# Altium PCB STM32_F407.PcbDoc
Units mil, origin at the board's own origin, x right, y up, seen from the top; angles counter-clockwise.
Board outline 5420 x 5865 mil, 2 copper layers (TopLayer, BottomLayer); 25 components, 137 nets, 447 pads, 0 vias.
Unrouted connection lines stored in the file: 288.
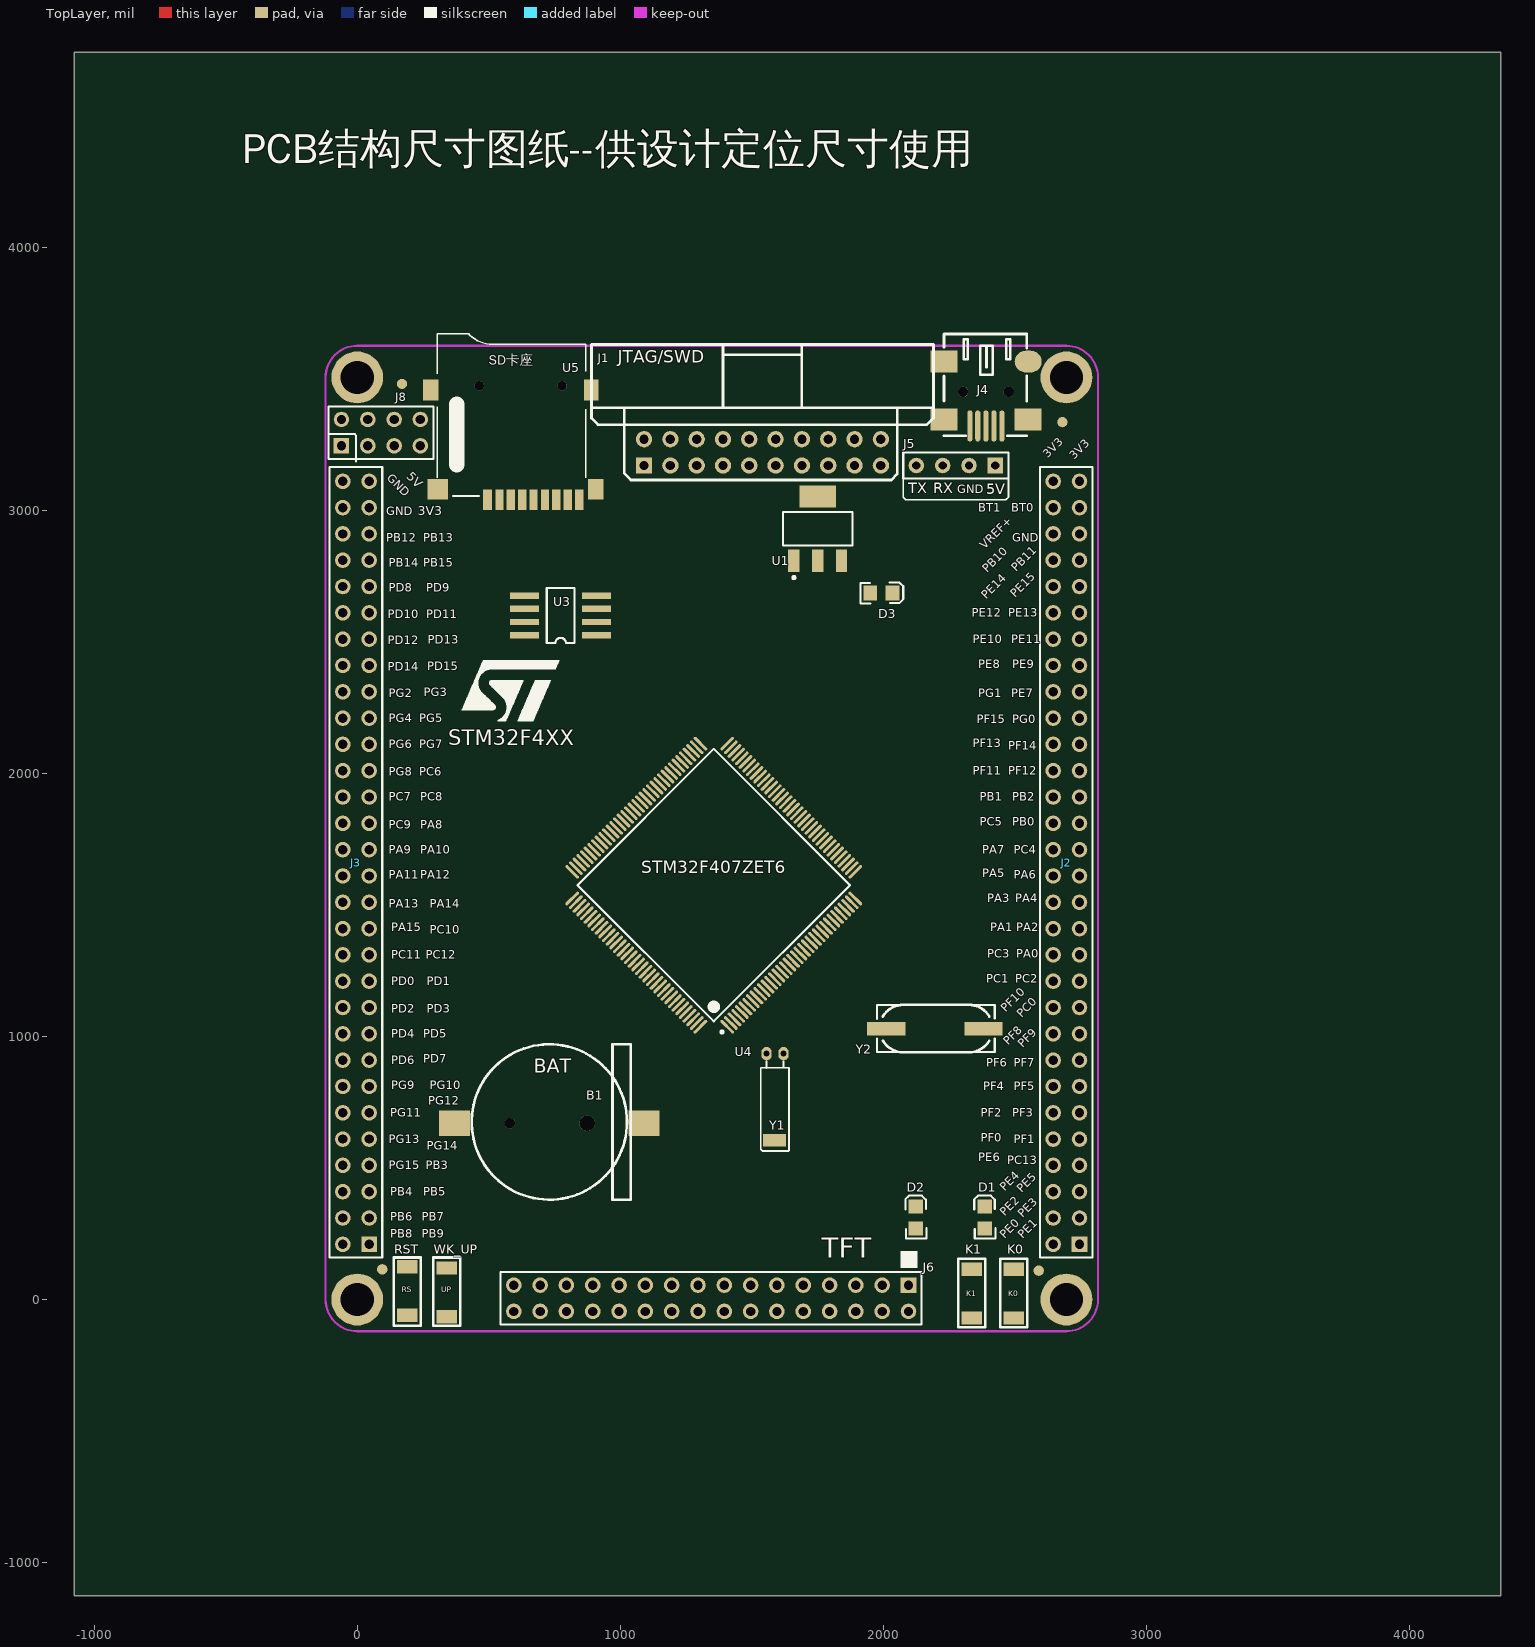
[diagram p0: TopLayer view]
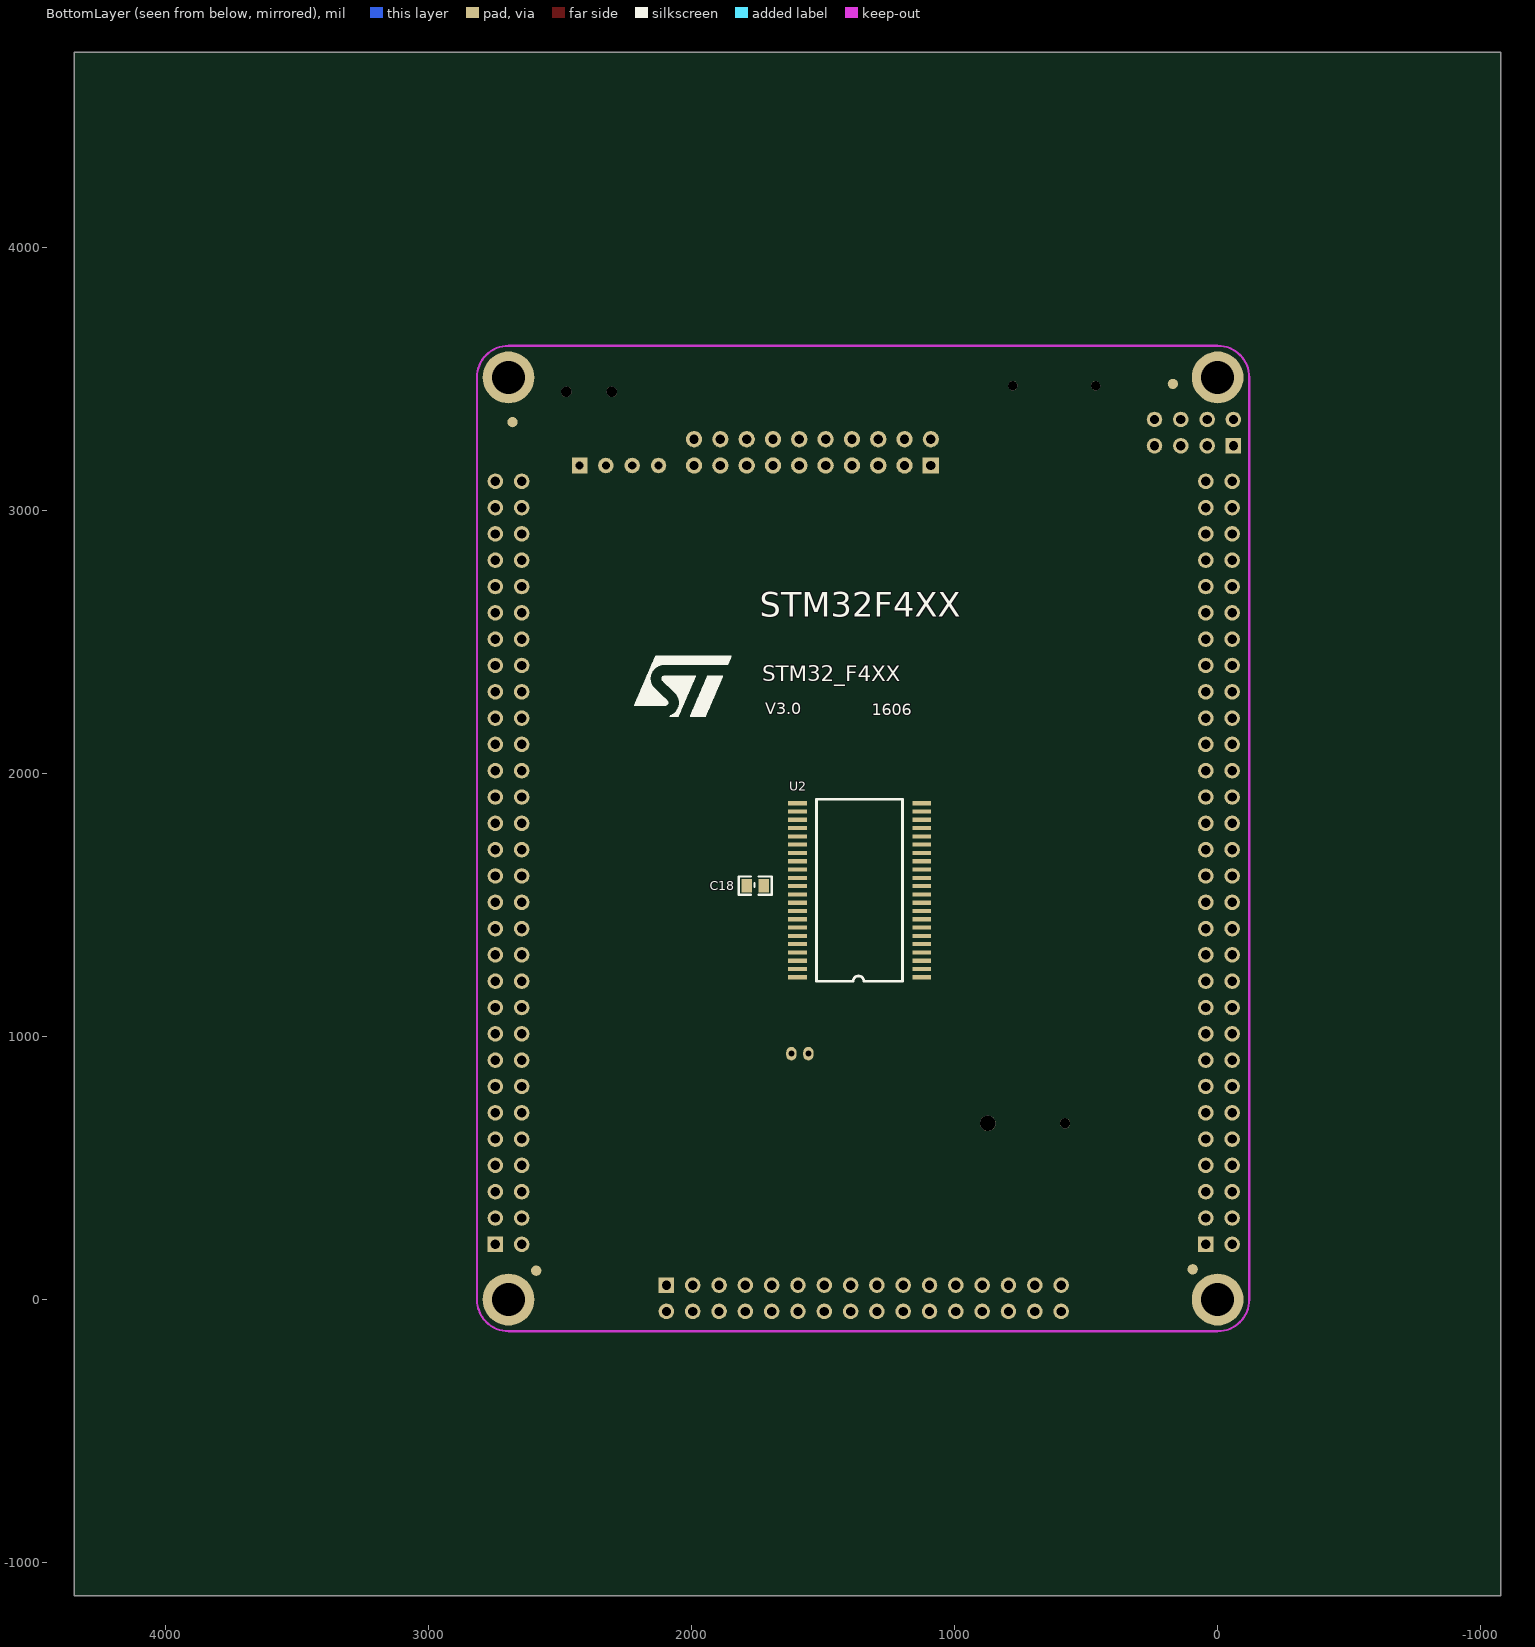
[diagram p1: BottomLayer view, seen from below]

## Layer stack, top to bottom
TopLayer: signal copper 1.4
Dielectric: core 12.6, FR-4, Dk 4.8
BottomLayer: signal copper 1.4

## Board outline
-1075,-1125 -1075,4740 4345,4740 4345,-1125

## Design rules (kind name [scope] priority, off if disabled: settings)
Clearance [All] p1: gap=16
ComponentClearance [All] p1: gap=1 collisioncheckmode=3 verticalgap=1 showdistances=FALSE
FabricationTestPointUsage TestPointUsage [All] p1: valid=0 allowmultiple=FALSE
FabricationTestpoint Testpoint [(IsPad And (OnTopLayer Or OnBottomLayer))] p1: side=3 testpointundercomponent=TRUE minsize=40 maxsize=100 preferedsize=60 minholesize=20 maxholesize=40 preferedholesize=32 testpointgrid=1 allowsidetop=TRUE allowsidebottom=TRUE usegrid=TRUE gridtolerance=0.01
PlaneClearance [All] p1: clearance=10
PolygonConnect PolygonConnect_1 [All vs (InPadClass('All Pads'))] p1: connectstyle=Relief reliefconductorwidth=15 reliefentries=4 polygonreliefangle="90 Angle"
PolygonConnect [All] p2: connectstyle=Direct reliefconductorwidth=10 reliefentries=4 polygonreliefangle="90 Angle"
RoutingVias [All] p1: holewidth=12 width=20 viastyle="Through Hole" minholewidth=12 minwidth=20 maxholewidth=12 maxwidth=20
SilkscreenOverComponentPads [IsPad] p1: minsilkscreentomaskgap=10
SolderMaskExpansion [All] p1: expansion=2
Width [All] p1: maxlimit=40 minlimit=8 preferedwidth=8 minimp=50.000000 maximp=50.000000 favimp=50.000000
23 further rules are at their usual default settings.

## Components (designator, comment, footprint, x,y, rotation, side; value= is the part's Value field where it differs from the comment)
B1 "CR1220" CP1220 1090,670 r0 top
C18 "104" RC0603 1730,1570 r0 bottom
D1 "LED" LED0805 2385,270 r270 top
D2 "LED" LED0805 2123,270 r270 top
D3 "LED" LED0805 1950,2685 r180 top
J1 "ARM_JTAG" JTAG20P 1090,3170 r0 top
J2 "IO_30X2" IDE2X30 2745,210 r90 top
J3 "IO_30X2" IDE2X30 45,210 r90 top
J4 "USB" MINUSB 2450,3320 r90 top
J5 "ISP_COM" HDR1X4 2425,3170 r180 top
J6 "Header 16X2" IDE2X16-2.54 2095,55 r0 top
J8 "NRF2401" DIP2X4-2.54 -60,3250 r0 top (schematic designator U2)
K0 "Jumper" key 2495,-70 r90 top
K1 "Jumper" key 2335,-70 r90 top
RST "Key" key 190,125.04 r270 top
U1 "AMS1117-3.3V" SOT223 1750,2930 r0 top
U2 "IS62WV51216BLL-55TLI" TSOP44 1125,1225 r0 bottom
U3 "W25Q16" SOIC8P 890,2525 r90 top
U4 "STM32F407ZET6" LQFP144N 1355,1575 r135 top
U5 "MiniSD" TF_SD 495,3040 r90 top
WK_UP "Jumper" key 340,-65 r90 top
Y1 "32.768k" 32.768k 1620,935 r180 top
Y2 "8MHz" SMD49S 2010,1030 r180 top
? "Comment" ST_Log 555,2295 r0 top
? "Comment" ST_Log 2060,2310 r180 bottom

## Footprints (in the part's own frame and the unit in brackets; to place one, negate y for a bottom-side part, rotate by r counter-clockwise, add the part's x,y. Pads: shape width x height; smd on the part's side, far side on the other; paste and mask are expansions set on the pad)
32.768k [mm]
  oval 1x1.3 hole 0.6: 1(0,0) 2(1.64,0)
  rect 2.2x1.2 smd: 3(0.875,8.382)
  silkscreen extent -0.53,0.76 2.2,9.4
CP1220 [mm]
  rect 3x2.5 smd: 1(0,0) 2(-18.288,0)
  round 1 hole 1: ""(-12.95,0)
  round 1.5 hole 1.5: ""(-5.5,0)
  silkscreen extent -16.64,-7.37 -1.27,7.63
DIP2X4-2.54 [mm]
  rect 1.5x1.5 hole 0.9: 1(0,-0.127)
  round 1.5 hole 0.9: 2(0,2.413) 3(2.54,-0.127) 4(2.54,2.413) 5(5.08,-0.127) 6(5.08,2.413) 7(7.62,-0.127) 8(7.62,2.413)
  silkscreen extent -1.27,-1.4 8.89,3.68
HDR1X4 [mm] "Connector; Header; 4 Position"
  rect 1.5x1.5 hole 0.8: 1(0,0)
  round 1.5 hole 0.8: 2(2.54,0) 3(5.08,0) 4(7.62,0)
  silkscreen extent -1.27,-1.27 8.89,1.27
IDE2X16-2.54 [mm]
  rect 1.5x1.5 hole 0.9: 1(0,0)
  round 1.5 hole 0.9: 2(0,-2.54) 3(-2.54,0) 4(-2.54,-2.54) 5(-5.08,0) 6(-5.08,-2.54) 7(-7.62,0) 8(-7.62,-2.54) 9(-10.16,0) 10(-10.16,-2.54) 11(-12.7,0) 12(-12.7,-2.54) 13(-15.24,0) 14(-15.24,-2.54) 15(-17.78,0) 16(-17.78,-2.54) 17(-20.32,0) 18(-20.32,-2.54) 19(-22.86,0) 20(-22.86,-2.54) 21(-25.4,0) 22(-25.4,-2.54) 23(-27.94,0) 24(-27.94,-2.54) 25(-30.48,0) 26(-30.48,-2.54) 27(-33.02,0) 28(-33.02,-2.54) 29(-35.56,0) 30(-35.56,-2.54) 31(-38.1,0) 32(-38.1,-2.54)
  silkscreen extent -39.37,-3.81 1.27,3.3
IDE2X30 [mm]
  rect 1.5x1.5 hole 0.9: 1(0,0)
  round 1.5 hole 0.9: 2(0,2.54) 3(2.54,0) 4(2.54,2.54) 5(5.08,0) 6(5.08,2.54) 7(7.62,0) 8(7.62,2.54) 9(10.16,0) 10(10.16,2.54) 11(12.7,0) 12(12.7,2.54) 13(15.24,0) 14(15.24,2.54) 15(17.78,0) 16(17.78,2.54) 17(20.32,0) 18(20.32,2.54) 19(22.86,0) 20(22.86,2.54) 21(25.4,0) 22(25.4,2.54) 23(27.94,0) 24(27.94,2.54) 25(30.48,0) 26(30.48,2.54) 27(33.02,0) 28(33.02,2.54) 29(35.56,0) 30(35.56,2.54) 31(38.1,0) 32(38.1,2.54) 33(40.64,0) 34(40.64,2.54) 35(43.18,0) 36(43.18,2.54) 37(45.72,0) 38(45.72,2.54) 39(48.26,0) 40(48.26,2.54) 41(50.8,0) 42(50.8,2.54) 43(53.34,0) 44(53.34,2.54) 45(55.88,0) 46(55.88,2.54) 47(58.42,0) 48(58.42,2.54) 49(60.96,0) 50(60.96,2.54) 51(63.5,0) 52(63.5,2.54) 53(66.04,0) 54(66.04,2.54) 55(68.58,0) 56(68.58,2.54) 57(71.12,0) 58(71.12,2.54) 59(73.66,0) 60(73.66,2.54)
  silkscreen extent -1.27,-1.27 75.06,3.81
JTAG20P [mil]
  rect 62x62 hole 35.43: 1(0,0)
  round 62 hole 35.43: 2(0,100) 3(100,0) 4(100,100) 5(200,0) 6(200,100) 7(300,0) 8(300,100) 9(400,0) 10(400,100) 11(500,0) 12(500,100) 13(600,0) 14(600,100) 15(700,0) 16(700,100) 17(800,0) 18(800,100) 19(900,0) 20(900,100)
  silkscreen extent -200,-55 1100,460
key [mm]
  rect 1.3x2 smd paste+0 mask+0.2: 1(0,0) 2(4.7,0)
  silkscreen extent -0.89,-1.3 5.72,1.3
LED0805 [mil]
  rect 52x56 smd: 1(0,0) 2(-84,0)
  silkscreen extent -125,-40 38,40
LQFP144N [mm]
  oval 1.75x0.297 smd: 1(-10.575,8.75) 2(-10.575,8.25) 3(-10.575,7.75) 4(-10.575,7.25) 5(-10.575,6.75) 6(-10.575,6.25) 7(-10.575,5.75) 8(-10.575,5.25) 9(-10.575,4.75) 10(-10.575,4.25) 11(-10.575,3.75) 12(-10.575,3.25) 13(-10.575,2.75) 14(-10.575,2.25) 15(-10.575,1.75) 16(-10.575,1.25) 17(-10.575,0.75) 18(-10.575,0.25) 19(-10.575,-0.25) 20(-10.575,-0.75) 21(-10.575,-1.25) 22(-10.575,-1.75) 23(-10.575,-2.25) 24(-10.575,-2.75) 25(-10.575,-3.25) 26(-10.575,-3.75) 27(-10.575,-4.25) 28(-10.575,-4.75) 29(-10.575,-5.25) 30(-10.575,-5.75) 31(-10.575,-6.25) 32(-10.575,-6.75) 33(-10.575,-7.25) 34(-10.575,-7.75) 35(-10.575,-8.25) 36(-10.575,-8.75) 73(10.575,-8.75) 74(10.575,-8.25) 75(10.575,-7.75) 76(10.575,-7.25) 77(10.575,-6.75) 78(10.575,-6.25) 79(10.575,-5.75) 80(10.575,-5.25) 81(10.575,-4.75) 82(10.575,-4.25) 83(10.575,-3.75) 84(10.575,-3.25) 85(10.575,-2.75) 86(10.575,-2.25) 87(10.575,-1.75) 88(10.575,-1.25) 89(10.575,-0.75) 90(10.575,-0.25) 91(10.575,0.25) 92(10.575,0.75) 93(10.575,1.25) 94(10.575,1.75) 95(10.575,2.25) 96(10.575,2.75) 97(10.575,3.25) 98(10.575,3.75) 99(10.575,4.25) 100(10.575,4.75) 101(10.575,5.25) 102(10.575,5.75) 103(10.575,6.25) 104(10.575,6.75) 105(10.575,7.25) 106(10.575,7.75) 107(10.575,8.25) 108(10.575,8.75)
  oval 0.297x1.75 smd: 37(-8.75,-10.575) 38(-8.25,-10.575) 39(-7.75,-10.575) 40(-7.25,-10.575) 41(-6.75,-10.575) 42(-6.25,-10.575) 43(-5.75,-10.575) 44(-5.25,-10.575) 45(-4.75,-10.575) 46(-4.25,-10.575) 47(-3.75,-10.575) 48(-3.25,-10.575) 49(-2.75,-10.575) 50(-2.25,-10.575) 51(-1.75,-10.575) 52(-1.25,-10.575) 53(-0.75,-10.575) 54(-0.25,-10.575) 55(0.25,-10.575) 56(0.75,-10.575) 57(1.25,-10.575) 58(1.75,-10.575) 59(2.25,-10.575) 60(2.75,-10.575) 61(3.25,-10.575) 62(3.75,-10.575) 63(4.25,-10.575) 64(4.75,-10.575) 65(5.25,-10.575) 66(5.75,-10.575) 67(6.25,-10.575) 68(6.75,-10.575) 69(7.25,-10.575) 70(7.75,-10.575) 71(8.25,-10.575) 72(8.75,-10.575) 109(8.75,10.575) 110(8.25,10.575) 111(7.75,10.575) 112(7.25,10.575) 113(6.75,10.575) 114(6.25,10.575) 115(5.75,10.575) 116(5.25,10.575) 117(4.75,10.575) 118(4.25,10.575) 119(3.75,10.575) 120(3.25,10.575) 121(2.75,10.575) 122(2.25,10.575) 123(1.75,10.575) 124(1.25,10.575) 125(0.75,10.575) 126(0.25,10.575) 127(-0.25,10.575) 128(-0.75,10.575) 129(-1.25,10.575) 130(-1.75,10.575) 131(-2.25,10.575) 132(-2.75,10.575) 133(-3.25,10.575) 134(-3.75,10.575) 135(-4.25,10.575) 136(-4.75,10.575) 137(-5.25,10.575) 138(-5.75,10.575) 139(-6.25,10.575) 140(-6.75,10.575) 141(-7.25,10.575) 142(-7.75,10.575) 143(-8.25,10.575) 144(-8.75,10.575)
  silkscreen extent -10.7,-9.3 9.3,9.57
MINUSB [mm]
  oval 3x0.5 smd: 1(0,0) 2(0.009,0.775) 3(0,1.549) 4(0.009,2.324) 5(0.009,3.086)
  rect 2.1x2.6 smd: ""(0.635,5.588) ""(0.635,-2.54) ""(6.223,5.588)
  round 1 hole 1: ""(3.299,-0.651) ""(3.299,3.749)
  oval 2.1x2.6 smd: ""(6.223,-2.54)
  silkscreen extent -0.94,-2.41 8.89,5.59
RC0603 [mil]
  rect 40x50 smd: 1(60,-3) 2(-5,-3)
  silkscreen extent -35,-38 90,32
SMD49S [mil]
  rect 146x51 smd: 1(0,0) 2(-370,0)
  silkscreen extent -413,-90 35,90
SOIC8P [mil]
  rect 24x110 smd: 1(0,-20) 2(50,-20) 3(100,-20) 4(150,-20) 5(150,255) 6(100,255) 7(50,255) 8(0,255)
  silkscreen extent -30,65 180,170
SOT223 [mm] "SOT-223/SC-73; 4 Leads; Body 6.7 x 7.3 mm, inc. leads (LxW max)"
  rect 1.1x2.15 smd: 1(-2.3,-3.1) 2(0,-3.1) 3(2.3,-3.1)
  rect 3.5x2.15 smd: 4(0,3.1)
  silkscreen extent -3.35,-4.85 3.35,1.63
ST_Log [mil]
  silkscreen extent -157,-95 212,135
TF_SD [mm]
  round 0.9 hole 0.9 unplated: 0(11,-7.2) 0(11,0.8)
  rect 2x0.85 smd: 1(0,0)
  rect 2x0.8 smd: 2(0,-1.15) 3(0,-2.25) 4(0,-3.35) 5(0,-4.45) 6(0,-5.55) 7(0,-6.65) 8(0,-7.75) 9(0,-8.85)
  rect 2x1.5 smd: 10(1,-10.45) 10(10.6,5.5)
  rect 2x2 smd: 10(1,4.8)
  rect 2x1.4 smd: 10(10.6,-10)
  silkscreen extent 0.36,-9.49 16,4.87
TSOP44 [mm]
  rect 1.8x0.4 smd: 1(-0.009,0.001) 2(-0.009,-0.799) 3(-0.009,-1.599) 4(-0.009,-2.399) 5(-0.009,-3.199) 6(-0.009,-3.999) 7(-0.009,-4.799) 8(-0.009,-5.599) 9(-0.009,-6.399) 10(-0.009,-7.199) 11(-0.009,-7.999) 12(-0.009,-8.799) 13(-0.009,-9.599) 14(-0.009,-10.399) 15(-0.009,-11.199) 16(-0.009,-11.999) 17(-0.009,-12.799) 18(-0.009,-13.599) 19(-0.009,-14.399) 20(-0.009,-15.199) 21(-0.009,-15.999) 22(-0.009,-16.799) 23(11.991,-16.799) 24(11.991,-15.999) 25(11.991,-15.199) 26(11.991,-14.399) 27(11.991,-13.599) 28(11.991,-12.799) 29(11.991,-11.999) 30(11.991,-11.199) 31(11.991,-10.399) 32(11.991,-9.599) 33(11.991,-8.799) 34(11.991,-7.999) 35(11.991,-7.199) 36(11.991,-6.399) 37(11.991,-5.599) 38(11.991,-4.799) 39(11.991,-3.999) 40(11.991,-3.199) 41(11.991,-2.399) 42(11.991,-1.599) 43(11.991,-0.799) 44(11.991,0.001)
  silkscreen extent 1.83,-17.2 10.16,0.4

## Part data
B1: library part BATTERY
C18: library part Cap, "Capacitor"
J1: library part JTAG, "JTAG"
J2 J3: library part "Header 30X2", "Header, 30-Pin, Dual row"
J4: library part usb
J5: library part "Header 4", "Header, 4-Pin"
J6: "Header, 16-Pin, Dual row"
J8: library part "Header 4X2", "Header, 4-Pin, Dual row"
K0 K1 WK_UP: "Jumper Wire"
RST: library part Jumper, "Jumper Wire"
U1: library part 11
U3: library part W25X16
Y1: library part CRYSTAL, "Crystal 8MHz PLUG"
Y2: library part XTAL, "Crystal Oscillator"

## Free pads (board coordinates)
  round 39.37 smd: 1(170,3480) ""(95,115) ""(2590,110) ""(2680,3335)
  round 196.85 hole 125.98: ""(0,0) ""(0,3505) ""(2695,0) ""(2695,3505)
  round 39.37 smd far side: ""(95,115) ""(170,3480) ""(2590,110) ""(2680,3335)

## Nets (pads, with @x,y where several pads share a name; then routed paths per layer and width w, separated by ;. In a path a pad name is that pad's centre, name@x,y a point inside that pad or via, vN(x,y) a via of type N, cw(c..) or ccw(c..) an arc to the next point about the centre after c; other vN are vias at no path point)
3V3: C18.2 D1.1 D2.1 D3.1 J1.1 J1.2 J2.59 J2.60 J3.57 J6.31 J8.2 U1.2 U1.4 U2.11 U2.33 U3.3 U3.7 U3.8 U4.17 U4.30 U4.39 U4.52 U4.62 U4.72 U4.84 U4.95 U4.108 U4.121 U4.131 U4.144 U5.4 WK_UP.1
5V: J3.59 J5.1 U1.3
BOOT0: U4.138
DCMI_D6: J2.5 U4.4
DCMI_D7: J2.8 U4.5
F_CS: J3.54 U3.1 U4.75
FSMC_A0: J2.10 U2.5 U4.10
FSMC_A1: J2.9 U2.4 U4.11
FSMC_A2: J2.12 U2.3 U4.12
FSMC_A3: J2.11 U2.2 U4.13
FSMC_A4: J2.14 U2.1 U4.14
FSMC_A5: J2.13 U2.44 U4.15
FSMC_A6: J2.37 J6.21 U2.43 U4.50
FSMC_A7: J2.40 U2.42 U4.53
FSMC_A8: J2.39 U2.27 U4.54
FSMC_A9: J2.42 U2.26 U4.55
FSMC_A10: J2.41 U2.25 U4.56
FSMC_A11: J2.44 U2.24 U4.57
FSMC_A12: J3.44 U2.22 U4.87
FSMC_A13: J3.43 U2.21 U4.88
FSMC_A14: J3.42 U2.20 U4.89
FSMC_A15: J3.41 U2.19 U4.90
FSMC_A16: J3.49 U2.18 U4.80
FSMC_A17: J3.48 U2.23 U4.81
FSMC_A18: J3.47 U2.28 U4.82
FSMC_D0: J3.46 J6.18 U2.7 U4.85
FSMC_D1: J3.45 J6.17 U2.8 U4.86
FSMC_D2: J3.22 J6.16 U2.9 U4.114
FSMC_D3: J3.21 J6.15 U2.10 U4.115
FSMC_D4: J2.43 J6.14 U2.13 U4.58
FSMC_D5: J2.46 J6.13 U2.14 U4.59
FSMC_D6: J2.45 J6.12 U2.15 U4.60
FSMC_D7: J2.48 J6.11 U2.16 U4.63
FSMC_D8: J2.47 J6.10 U2.29 U4.64
FSMC_D9: J2.50 J6.9 U2.30 U4.65
FSMC_D10: J2.49 J6.8 U2.31 U4.66
FSMC_D11: J2.52 J6.7 U2.32 U4.67
FSMC_D12: J2.51 J6.6 U2.35 U4.68
FSMC_D13: J3.52 J6.5 U2.36 U4.77
FSMC_D14: J3.51 J6.4 U2.37 U4.78
FSMC_D15: J3.50 J6.3 U2.38 U4.79
FSMC_NBL0: J2.2 U2.39 U4.141
FSMC_NBL1: J2.1 U2.40 U4.142
FSMC_NE3: J3.13 U2.6 U4.125
FSMC_NE4: J3.11 J6.22 U4.127
FSMC_NOE: J3.18 J6.19 U2.41 U4.118
FSMC_NWE: J3.17 J6.20 U2.17 U4.119
GND: B1.2 C18.1 J1.4 J1.6 J1.8 J1.10 J1.12 J1.14 J1.16 J1.18 J1.20 J2.55 J3.58 J3.60 J4.5 J4.@2230,3345 J4.@2230,3565 J4.@2550,3345 J4.@2550,3565 J5.2 J6.1 J6.30 J6.32 J8.1 K0.1 K1.1 RST.2 U1.1 U2.12 U2.34 U3.4 U4.16 U4.31 U4.38 U4.51 U4.61 U4.83 U4.94 U4.107 U4.120 U4.130 U5.6 U5.9 U5.10 Y1.3
KEY0: J2.6 K0.2 U4.3
KEY1: J2.3 K1.2 U4.2
LCD_BL: J3.53 U4.76
LED0: J2.17 U4.21
LED1: J2.20 U4.22
NetB1_1: B1.1
NetC9_1: U4.24 Y2.2
NetC10_1: U4.23 Y2.1
NetC11_1: U4.71
NetC12_1: U4.106
NetD1_2: D1.2
NetD2_2: D2.2
NetD3_2: D3.2
NetJ2_57: J2.57
NetJ4_1: J4.1
NetJ4_2: J4.2
NetJ4_3: J4.3
NetJ6_27: J6.27
NetJ6_28: J6.28
NetQ2_1: 
NetR26_1: U4.143
NetR27_1: U3.6
NRF_CE: J3.40 J8.3 U4.91
NRF_CS: J3.39 J8.4 U4.92
NRF_IRQ: J3.38 J8.8 U4.93
PA0/WK_UP: J2.23 U4.34 WK_UP.2
PA1: J2.26 U4.35
PA2: J2.25 U4.36
PA3: J2.28 U4.37
PA4: J2.27 U4.40
PA5: J2.30 U4.41
PA6: J2.29 U4.42
PA7: J2.32 U4.43
PA8: J3.33 U4.100
PA9/TXD1: J3.32 J5.4 U4.101
PA10/RXD1: J3.31 J5.3 U4.102
PA11/USB_DM: J3.30 U4.103
PA12/USB_DP: J3.29 U4.104
PA13/TMS: J1.7 J3.28 U4.105
PA14/TCK: J1.9 J3.27 U4.109
PA15/TDI: J1.5 J3.26 U4.110
PB0: J2.33 J6.23 U4.46
PB1: J2.36 U4.47
PB2/BOOT1: J2.35 J2.58 J6.26 U4.48
PB3/TDO: J1.13 J3.7 J8.5 U4.133
PB4/TRST: J1.3 J3.6 J8.7 U3.2 U4.134
PB5: J3.5 J8.6 U3.5 U4.135
PB6: J3.4 U4.136
PB7: J3.3 U4.137
PB8: J3.2 U4.139
PB9: J3.1 U4.140
PB10: J2.54 U4.69
PB11: J2.53 U4.70
PB12: J3.56 U4.73
PB13: J3.55 U4.74
PC0: J2.19 U4.26
PC1: J2.22 U4.27
PC2: J2.21 U4.28
PC3: J2.24 U4.29
PC4: J2.31 U4.44
PC5: J2.34 U4.45
PC6: J3.37 U4.96
PC7: J3.36 U4.97
PC8: J3.35 U4.98 U5.7
PC9: J3.34 U4.99 U5.8
PC10: J3.25 U4.111 U5.1
PC11: J3.24 U4.112 U5.2
PC12: J3.23 U4.113 U5.5
PC13: J2.7 J6.24 U4.7
PC14: U4.8 Y1.2
PC15: U4.9 Y1.1
PD2: J3.20 U4.116 U5.3
PD3: J3.19 U4.117
PD6: J3.16 U4.122
PD7: J3.15 U4.123
PE2: J2.4 U4.1
PF6: J2.16 U4.18
PF7: J2.15 U4.19
PF8: J2.18 U4.20
PF11: J2.38 J6.25 U4.49
PG9: J3.14 U4.124
PG11: J3.12 U4.126
PG13: J3.10 U4.128
PG14: J3.9 U4.129
PG15: J3.8 U4.132
RST: J1.15 J6.2 RST.1 U4.25
VBAT: U4.6
VDDA: U4.33
VREF+: J2.56 U4.32
pads on no net: B1. J1.11 J1.17 J1.19 J4.4 J4.@2302.38,3449.87 J4.@2475.61,3449.87 J6.29 U5.0

## Keep-outs
KeepOutLayer:
  lines w8: -120.21,0 ccw(c0,0) 0,-120.21 2695,-120.21 ccw(c2695,0) 2815.21,0 2815.21,3505 ccw(c2695,3505) 2695,3625.21 0,3625.21 ccw(c0,3505) -120.21,3505 -120.21,0

## Silkscreen, mask and mechanical layers (free items; w line width, h text height)
TopOverlay:
  lines w7: -110,3290 -10,3290 -5,3285 -5,3185 ; 2075,3120 2075,3050 2085,3040 2465,3040 2475,3050 2475,3120
  text "PCB结构尺寸图纸--供设计定位尺寸使用" at -435,4280 h200
  text "JTAG/SWD" at 990,3545 h80
  text "SD卡座" at 500,3540 h65
  text "3V3" at 2625,3195 h32 r45
  text "3V3" at 2725,3190 h32 r45
  text "5V" at 185,3125 h35 r315
  text "GND" at 110,3120 h32 r315
  text "TX" at 2095,3065 h40
  text "RX" at 2190,3065 h40
  text "GND" at 2280,3065 h32
  text "5V" at 2390,3060 h40
  text "BT1" at 2360,2995 h32
  text "BT0" at 2485,2995 h32
  text "GND" at 110,2980 h32
  text "3V3" at 230,2980 h35
  text "PB12" at 110,2880 h32
  text "PB13" at 250,2880 h32
  text "GND" at 2490,2880 h32
  text "VREF+" at 2385,2850 h32 r45
  text "PB14" at 120,2785 h32
  text "PB15" at 250,2785 h32
  text "PB11" at 2505,2765 h32 r45
  text "PB10" at 2395,2760 h32 r45
  text "PD8" at 120,2690 h32
  text "PD9" at 262,2690 h32
  text "PE15" at 2500,2665 h32 r45
  text "PE14" at 2390,2660 h32 r45
  text "PE12" at 2335,2595 h32
  text "PE13" at 2475,2595 h32
  text "PD10" at 115,2590 h32
  text "PD11" at 262,2590 h32
  text "PE10" at 2340,2495 h32
  text "PE11" at 2485,2495 h32
  text "PD13" at 268.35,2491.65 h32
  text "PD12" at 115,2490 h32
  text "PE8" at 2360,2400 h32
  text "PE9" at 2490,2400 h32
  text "PD15" at 266.43,2391.96 h32
  text "PD14" at 115,2390 h32
  text "PG3" at 252.43,2292.83 h32
  text "PG2" at 120,2290 h32
  text "PG1" at 2360,2290 h32
  text "PE7" at 2485,2290 h32
  text "PG4" at 120,2195 h32
  text "PG5" at 235,2195 h32
  text "PF15" at 2355,2190 h32
  text "PG0" at 2490,2190 h32
  text "PF13" at 2340,2100 h32
  text "PG6" at 120,2095 h32
  text "PG7" at 235,2095 h32
  text "PF14" at 2475,2090 h32
  text "STM32F4XX" at 345,2088 h100
  text "PF11" at 2340,1995 h32
  text "PF12" at 2475,1995 h32
  text "PG8" at 120,1990 h32
  text "PC6" at 235,1990 h32
  text "PC7" at 120,1895 h32
  text "PC8" at 240,1895 h32
  text "PB1" at 2365,1895 h32
  text "PB2" at 2490,1895 h32
  text "PC5" at 2365,1800 h32
  text "PB0" at 2490,1800 h32
  text "PC9" at 120,1790 h32
  text "PA8" at 240,1790 h32
  text "PA9" at 120,1695 h32
  text "PA10" at 240,1695 h32
  text "PA7" at 2375,1695 h32
  text "PC4" at 2495,1695 h32
  text "STM32F407ZET6" at 1080,1605 h80
  text "PA5" at 2375,1605 h32
  text "PA11" at 120,1600 h32
  text "PA12" at 240,1600 h32
  text "PA6" at 2495,1600 h32
  text "PA3" at 2395,1510 h32
  text "PA4" at 2500,1510 h32
  text "PA13" at 120,1490 h32
  text "PA14" at 275,1490 h32
  text "PA15" at 130,1400 h32
  text "PA1" at 2405,1400 h32
  text "PA2" at 2505,1400 h32
  text "PC10" at 275,1390 h32
  text "PC3" at 2395,1300 h32
  text "PA0" at 2505,1300 h32
  text "PC11" at 130,1295 h32
  text "PC12" at 260,1295 h32
  text "PC1" at 2390,1205 h32
  text "PC2" at 2500,1205 h32
  text "PD0" at 130,1195 h32
  text "PD1" at 265,1195 h32
  text "PD2" at 130,1090 h32
  text "PD3" at 265,1090 h32
  text "PF10" at 2465,1090 h32 r45
  text "PC0" at 2525,1070 h32 r45
  text "PD4" at 130,995 h32
  text "PD5" at 250,995 h32
  text "PF8" at 2475,965 h32 r45
  text "PF9" at 2530,955 h32 r45
  text "PD7" at 250,900 h32
  text "PD6" at 130,895 h32
  text "PF6" at 2390,885 h32
  text "PF7" at 2495,885 h32
  text "BAT" at 670,845 h90
  text "PG9" at 130,800 h32
  text "PG10" at 275,800 h32
  text "PF4" at 2380,796.42 h32
  text "PF5" at 2495,795 h32
  text "PG12" at 270,740 h32
  text "PG11" at 125,695 h32
  text "PF2" at 2370,695 h32
  text "PF3" at 2490,695 h32
  text "PF0" at 2370,600 h32
  text "PG13" at 120,595 h32
  text "PF1" at 2495,595 h32
  text "PG14" at 265,570 h32
  text "PE6" at 2360,525 h32
  text "PC13" at 2470,515 h32
  text "PG15" at 120,495 h32
  text "PB3" at 260,495 h32
  text "PE4" at 2460,410 h32 r45
  text "PE5" at 2525,405 h32 r45
  text "PB4" at 125,395 h32
  text "PB5" at 250,395 h32
  text "PE2" at 2460,315 h32 r45
  text "PE3" at 2530,310 h32 r45
  text "PB6" at 125,300 h32
  text "PB7" at 245,300 h32
  text "PB8" at 125.25,235.25 h32
  text "PB9" at 245,235 h32
  text "PE0" at 2460,230 h32 r45
  text "PE1" at 2530,230 h32 r45
  text "TFT" at 1765,135 h130
  text "RS" at 170,20 h35
  text "UP" at 320,20 h35
  text "K1" at 2315,5 h35
  text "K0" at 2475,5 h35
BottomOverlay:
  text "STM32F4XX" at 1740,2565 h160
  text "STM32_F4XX" at 1730,2350 h60
  text "V3.0" at 1720,2225 h45
  text "1606" at 1315,2220 h45

## Dimensions
2695,0 to 2968.06,-273.06 on TopOverlay
0,3505 to 2695,3505 on TopOverlay
0,3505 to 0,0 on TopOverlay
2695,-120.21 to 2695,3625.21 on TopOverlay
2815.21,0 to -120.21,0 on TopOverlay